# EAGLE board transistor (EAGLE 9.7.0)

Size 74.35 x 61.63 mm. Coordinates in mm from the lower left corner, seen from the top.
Outline: 0,0 74.35,0 74.35,61.63 0,61.63 0,0
Copper layers (1*16): Top 0.035mm / dielectric 1.5mm / Bottom 0.035mm
Design rules "default": minimum track width 6mil, minimum drill 0.35mm, track to track 6mil, track to pad 6mil, pad to pad 6mil, via to via 6mil, smd to smd 6mil, copper to edge 40mil, drill to drill 6mil, minimum pad ring 10mil, minimum via ring 8mil, stop-mask expansion 4mil, vias tented up to drill 0mil, thermal gap 10mil

## Footprints (pad centres in the part's own frame; a part is rotated, then mirrored left to right if it is on the bottom)
BATTERY-GENERIC = drill 1.118 pad 3.15 octagon: + 2.54,0; - -2.54,0
1X02 = drill 1.016 long: 1 -1.27,0; 2 1.27,0
RESAD1016W63L850D250B = drill 0.83 pad 1.43: 1 -5.08,0; 2 5.08,0
SWITCH-MOMENTARY-PTH-6.5MM = drill 1.016 pad 1.88: 1 -3.251,2.261; 2 3.251,2.261; 3 -3.251,-2.261; 4 3.251,-2.261
TO92 = drill 0.813 octagon: 1 -1.27,0; 2 0,1.905; 3 1.27,0

## Placement (x,y rotation side)
BAT1  9V  [BATTERY-GENERIC]  66.1,20.58 270 top
BAT3  4.5V  [BATTERY-GENERIC]  29.8,8.26 0 top
L1  LIGHTBULB  [1X02]  5.79,34.77 0 top
R1  1k  [RESAD1016W63L850D250B]  27.65,42.79 90 top
S2  SWITCH_MOMENTARY  [SWITCH-MOMENTARY-PTH-6.5MM]  39.65,23.56 0 top
T1  NPN  [TO92]  27.78,55.53 0 top

## Library data of the parts
BAT1 BAT3 L1 R1 S2 = Tinkercad
T1 = Tinkercad; CATEGORY: Transistor; SUB-CATEGORY: BJT; TYPE: NPN

## Nets
BAT1+: BAT1.+ L1.2
BAT1-: BAT1.- BAT3.- T1.3
BAT3+: BAT3.+ S2.3
L1_1: L1.1 T1.1
S2_1: R1.1 S2.1
T1_B: R1.2 T1.2

## Tracks (layer width: path | path; a pad name or v marks a point on that pad's centre or on a via)
BAT1+  (1 unrouted)
BAT1-  (2 unrouted)
BAT3+  (1 unrouted)
L1_1  (1 unrouted)
S2_1  (1 unrouted)
T1_B  (1 unrouted)